# Altium PCB PCB_innerRing.PcbDoc
Units mil, origin at the board's own origin, x right, y up, seen from the top; angles counter-clockwise.
Board outline 3649.61 x 3649.61 mil, 2 copper layers (Top Layer, Bottom Layer); 31 components, 15 nets, 100 pads, 10 vias.
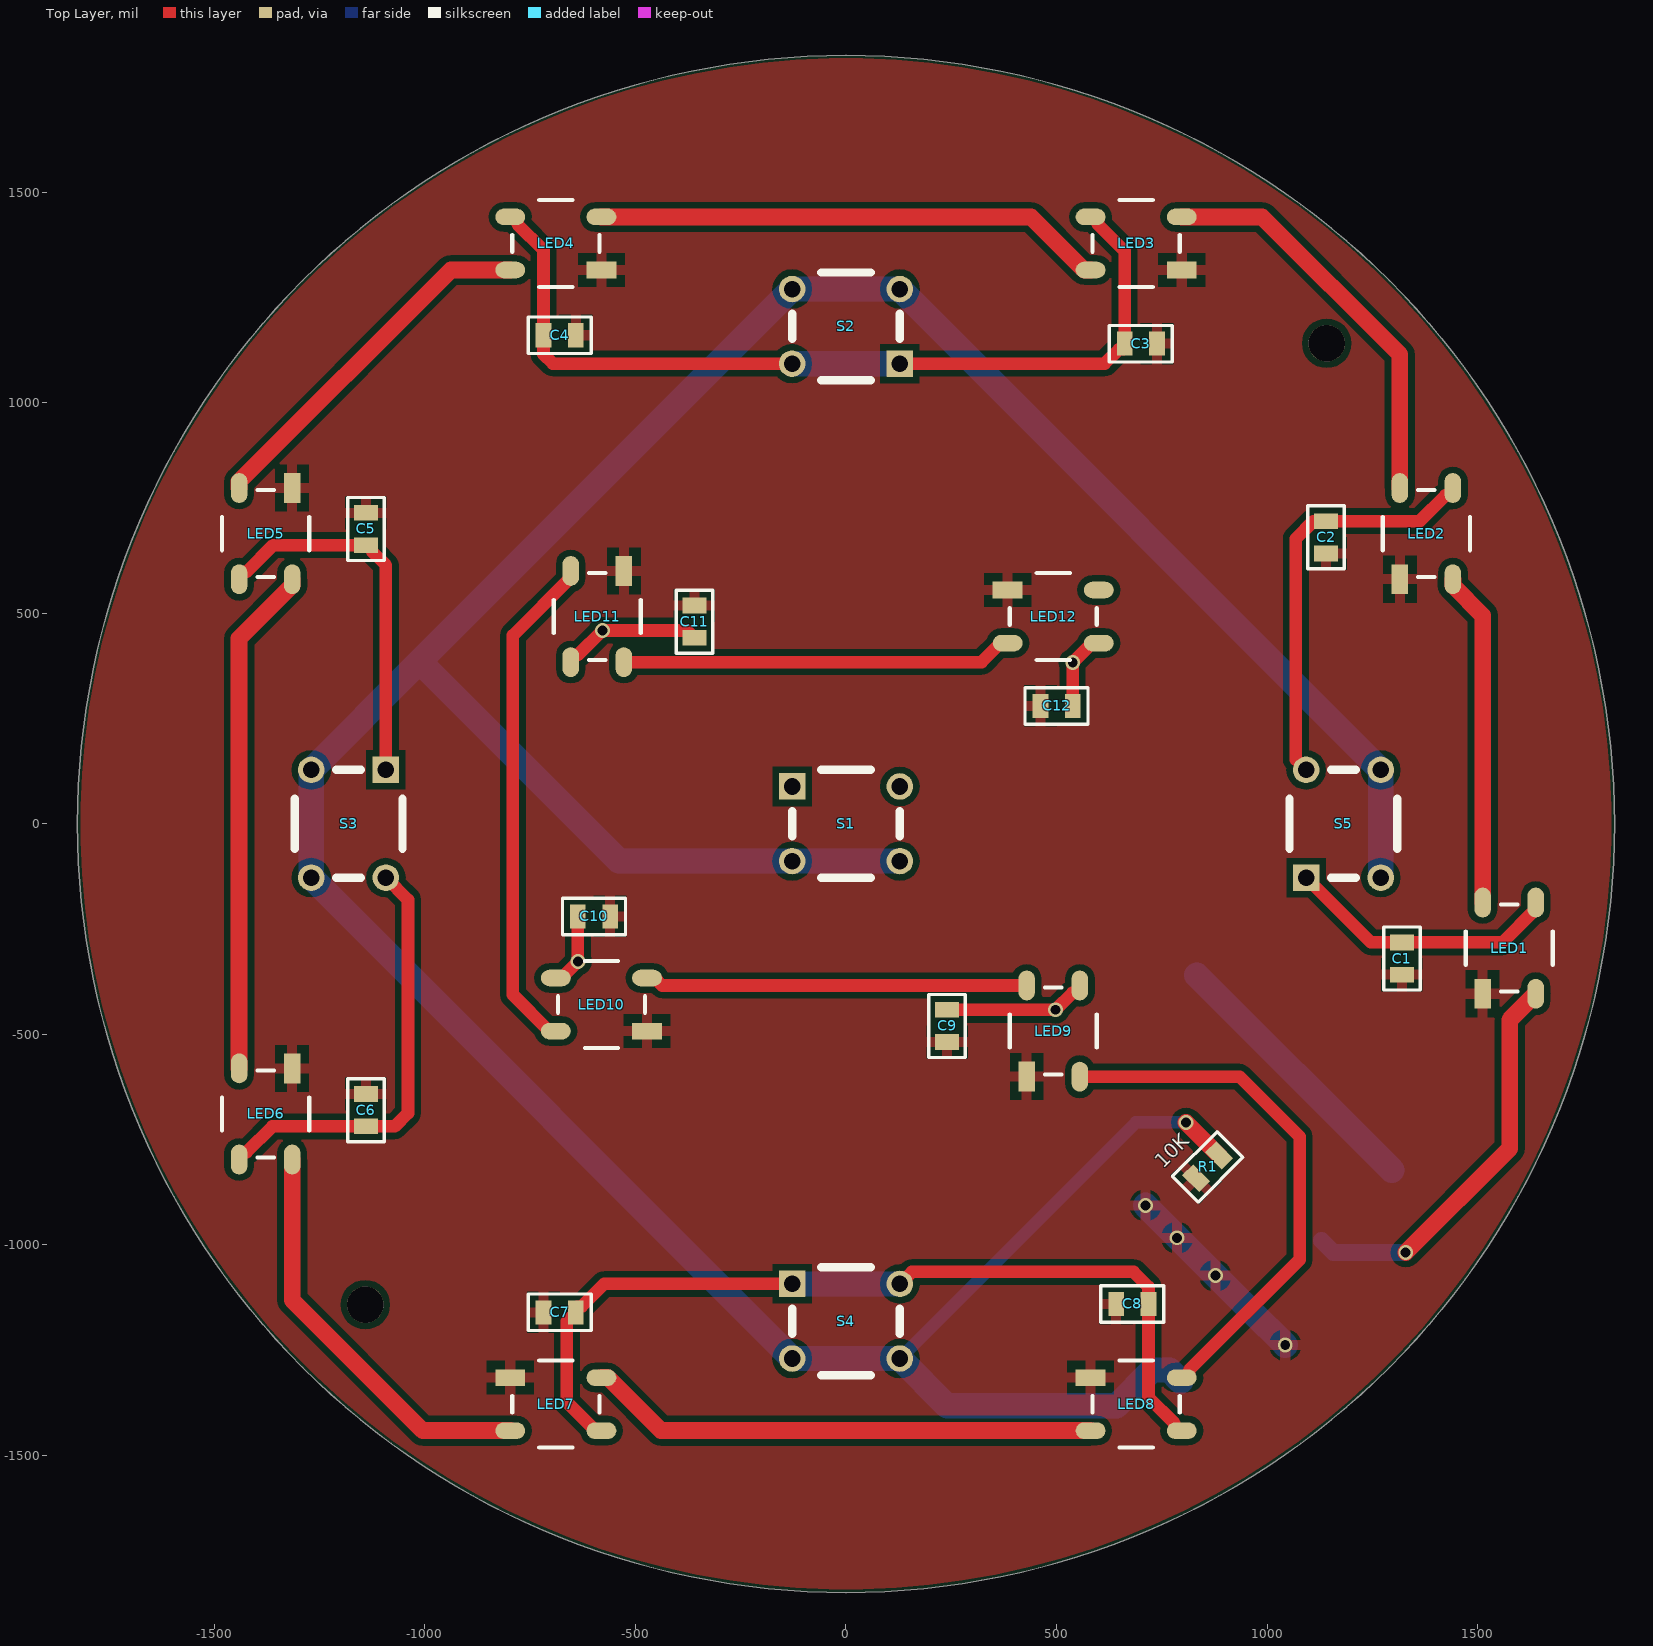
[diagram p0: Top Layer view]
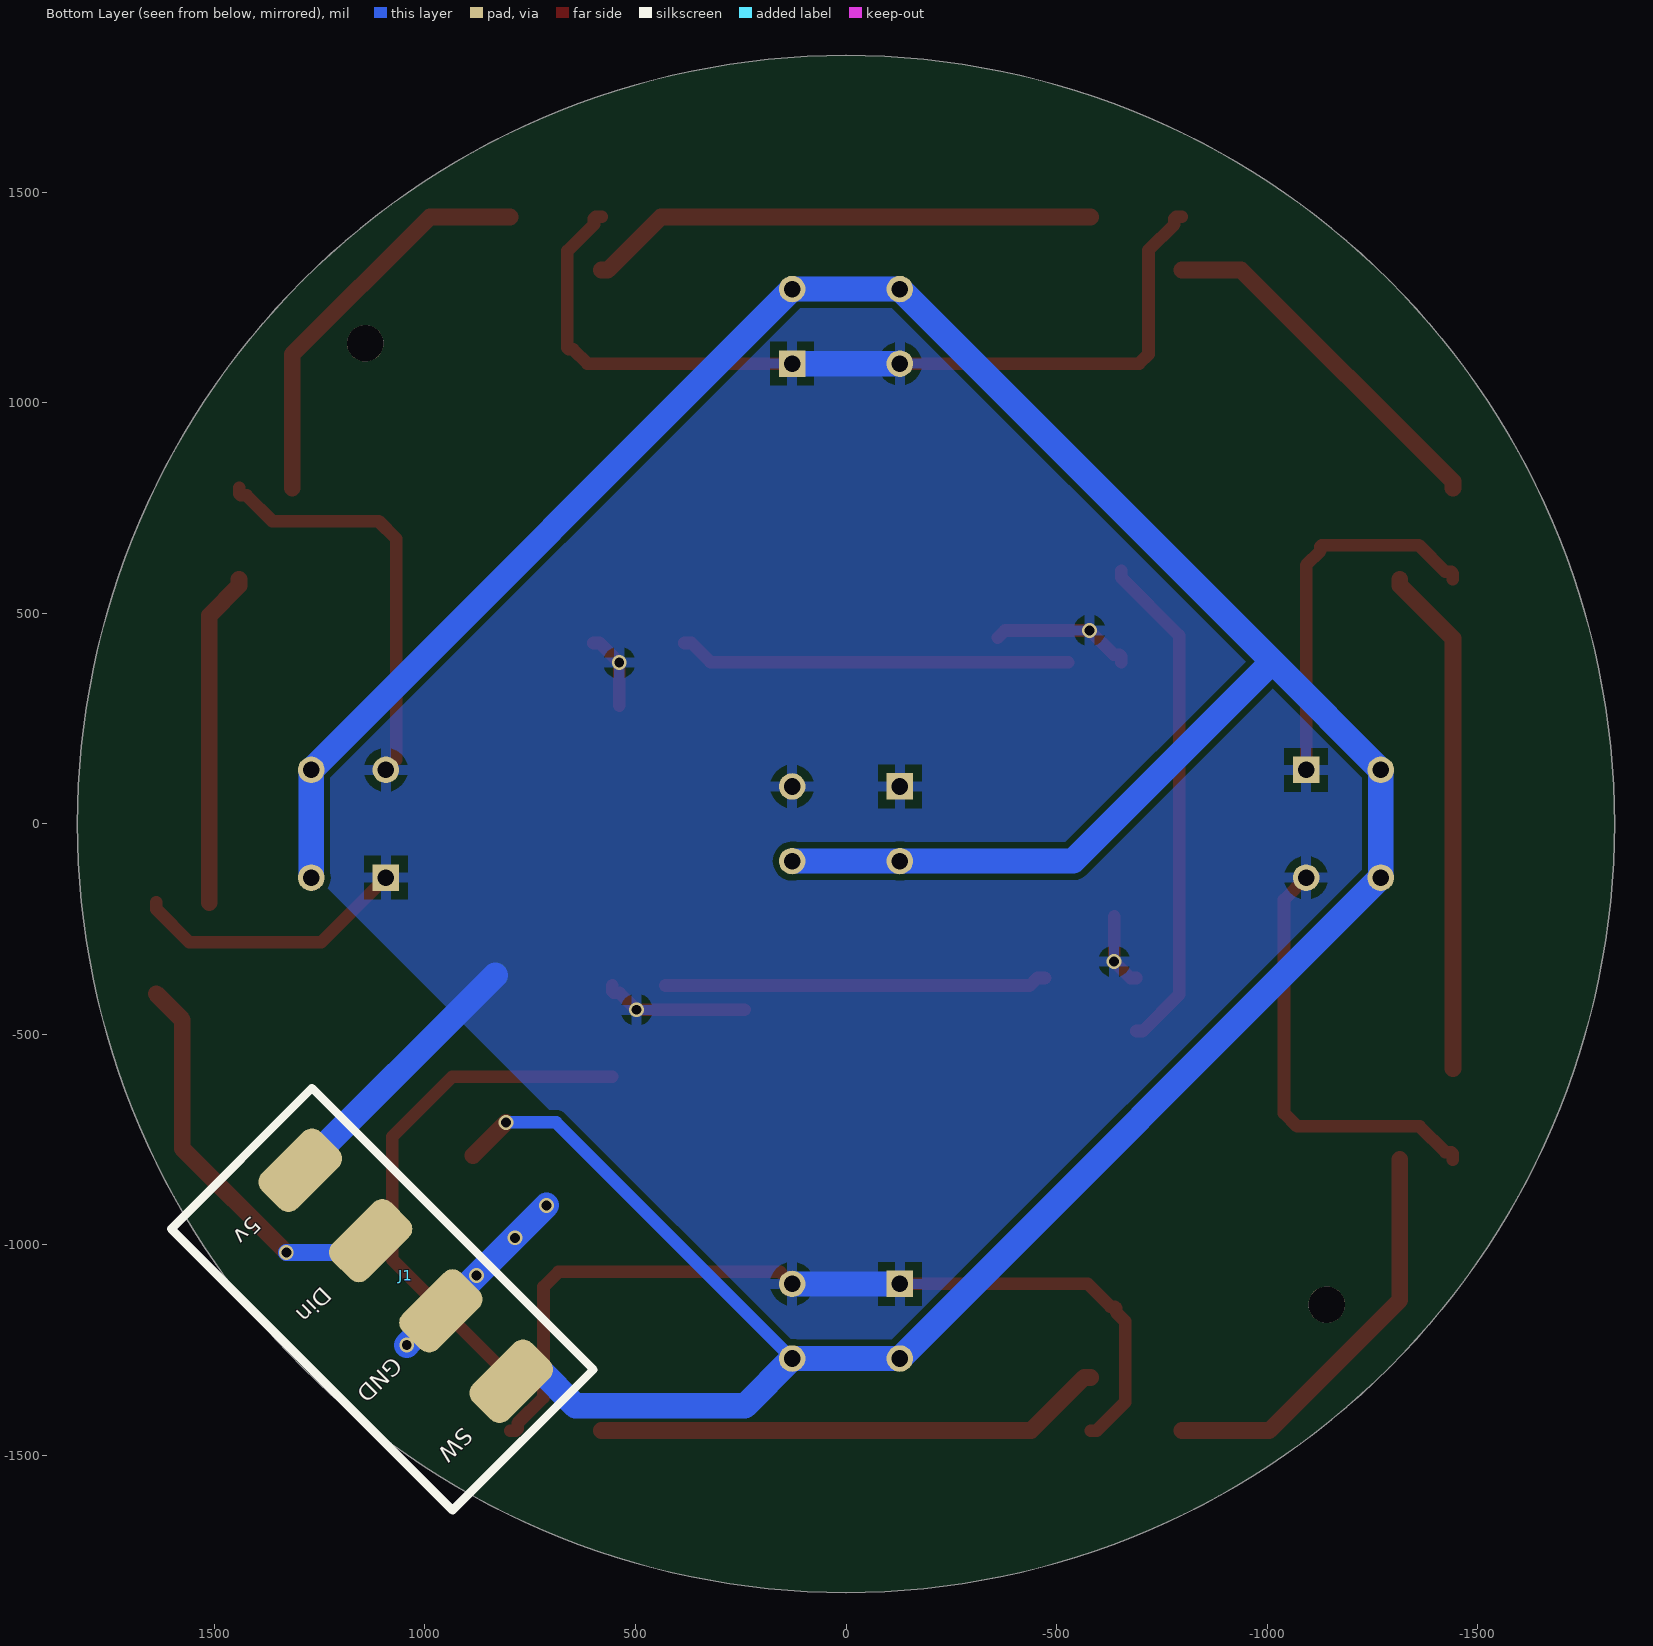
[diagram p1: Bottom Layer view, seen from below]
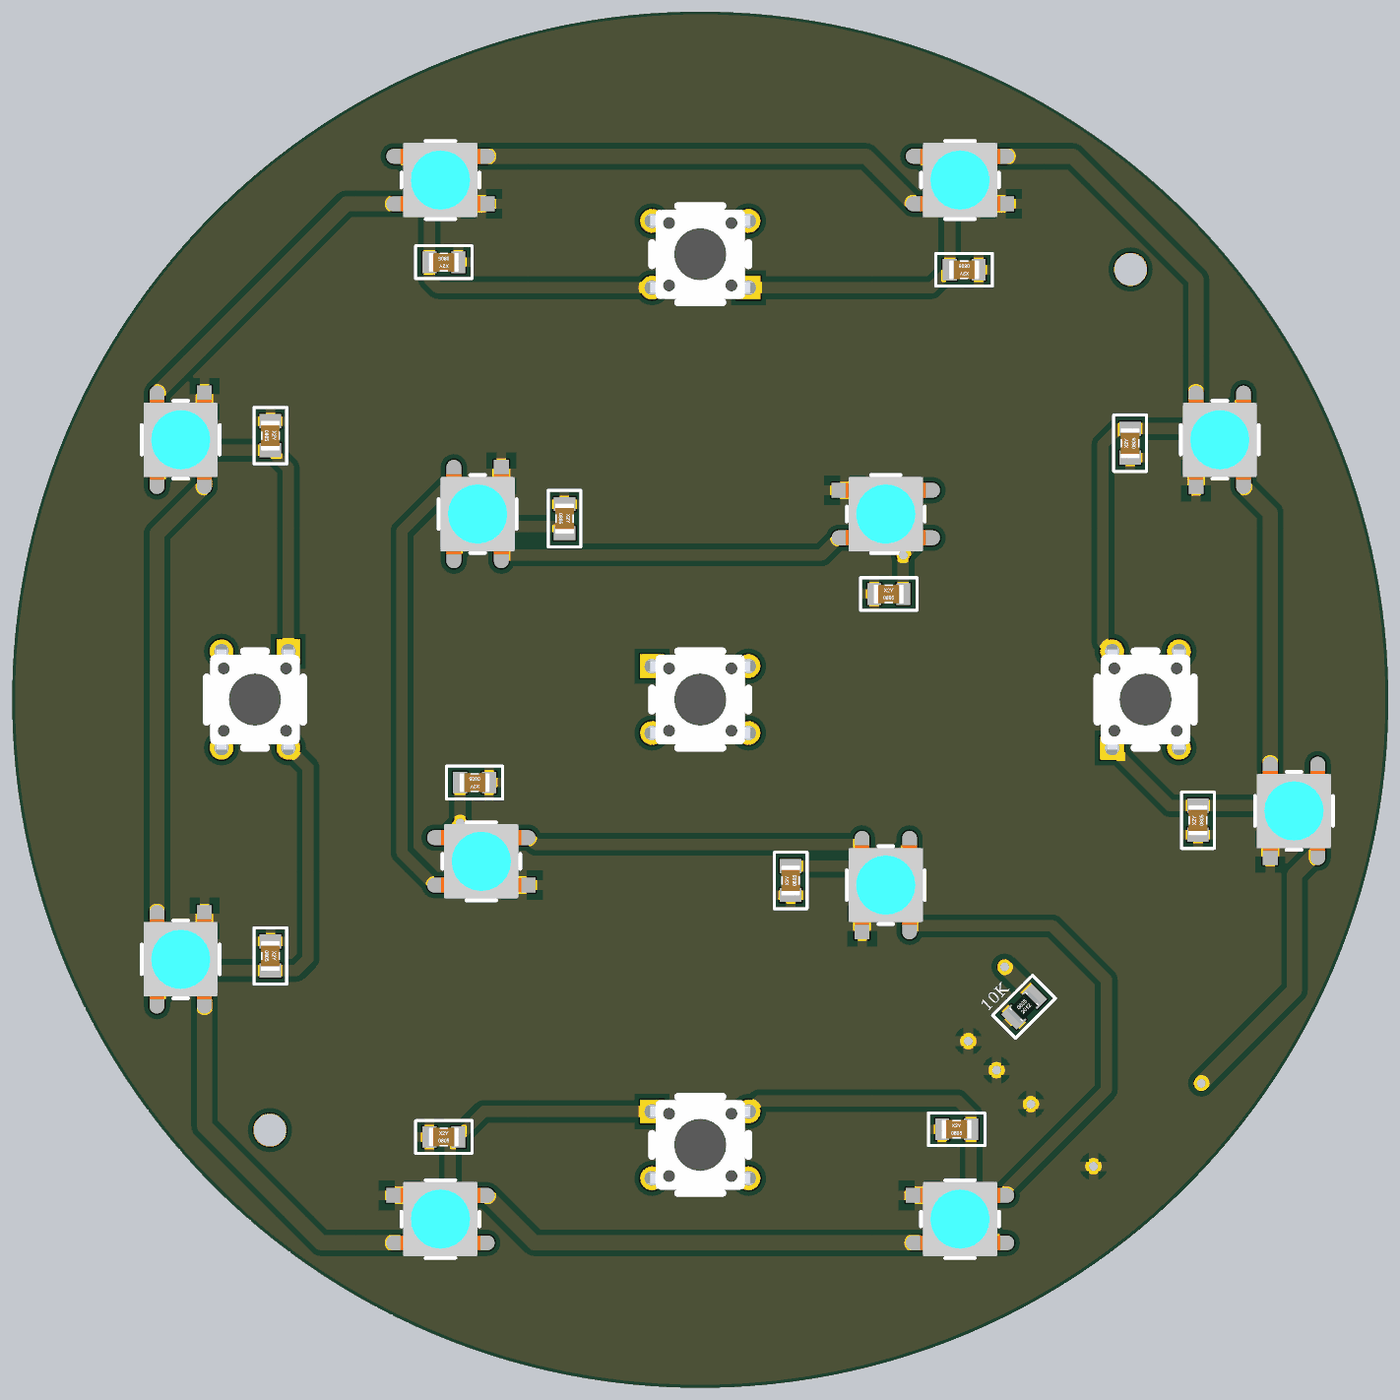
[diagram p2: 3D render of the assembled board from above, using the file's embedded part models]

## Layer stack, top to bottom
Top Solder: solder mask 0.4, Solder Resist, Dk 3.5
Top Layer: signal copper 1.4
Dielectric 1: dielectric 12.6, FR-4, Dk 4.8
Bottom Layer: signal copper 1.4
Bottom Solder: solder mask 0.4, Solder Resist, Dk 3.5

## Board outline
0,-1825.31 cw(c0,-0.5) -1824.8,-0.5 cw(c0,-0.5) 0,1824.3 cw(c0,-0.5) 1824.8,-0.5 cw(c0,-0.5)

## Design rules (kind name [scope] priority, off if disabled: settings)
Clearance [All] p1: gap=15 ignorepadtopadclearanceinfootprint=FALSE except(5: Arc-THPad Arc-Text Arc-Hole Track-THPad Track-Text Track-Hole SMDPad-SMDPad SMDPad-THPad SMDPad-Via SMDPad-Text SMDPad-Hole THPad-THPad THPad-Via THPad-Text THPad-Hole Via-Via Via-Text Via-Hole Fill-Text Fill-Hole Poly-Text Poly-Hole Region-Text Region-Hole Text-Text Text-Hole; 7: Arc-SMDPad Track-SMDPad; 9: Arc-Arc Arc-Track Track-Track; 10: Arc-Via Track-Via)
HoleSize [All] p1: absolutevalues=TRUE maxlimit=196.85 minlimit=1 maxpercent=80.000 minpercent=20.000
MinimumSolderMaskSliver [All] p1: minsoldermaskwidth=0
PolygonConnect [All] p1: connectstyle=Relief reliefconductorwidth=25 reliefentries=4 polygonreliefangle="90 Angle" airgapwidth=20
RoutingVias [All] p1: holewidth=11.81 width=19.68 viastyle="Through Hole" minholewidth=11.81 minwidth=19.68 maxholewidth=47.24 maxwidth=78.74
SilkToSilkClearance [All] p1: silktosilkclearance=5
SilkToSolderMaskClearance [IsPad] p1: minsilkscreentomaskgap=5 clearancetoexposedcopper=TRUE
SolderMaskExpansion [All] p1: expansion=4
Width [All] p1: maxlimit=100 minlimit=5 preferedwidth=10
26 further rules are at their usual default settings.

## Components (designator, comment, footprint, x,y, rotation, side; value= is the part's Value field where it differs from the comment)
C1 "capacitor0.1uf" Capacitor0805 1320,-320 r90 top
C2 "capacitor0.1uf" Capacitor0805 1140,680 r90 top
C3 "capacitor0.1uf" Capacitor0805 700,1140 r180 top
C4 "capacitor0.1uf" Capacitor0805 -680,1160 r180 top
C5 "capacitor0.1uf" Capacitor0805 -1140,700 r270 top
C6 "capacitor0.1uf" Capacitor0805 -1140,-680 r270 top
C7 "capacitor0.1uf" Capacitor0805 -680,-1160 r0 top
C8 "capacitor0.1uf" Capacitor0805 680,-1140 r0 top
C9 "capacitor0.1uf" Capacitor0805 240,-480 r90 top
C10 "capacitor0.1uf" Capacitor0805 -598.39,-220 r180 top
C11 "capacitor0.1uf" Capacitor0805 -360,480 r270 top
C12 "capacitor0.1uf" Capacitor0805 500,280 r0 top
J1 "4pins_edge_connector" 4pins_edge_connector 1114.96,-1142.8 r225 bottom
LED1 "Ws2812B" ws2812b 1574.8,-295.28 r270 top
LED2 "Ws2812B" ws2812b 1377.95,688.98 r270 top
LED3 "Ws2812B" ws2812b 688.98,1377.95 r0 top
LED4 "Ws2812B" ws2812b -688.98,1377.95 r0 top
LED5 "Ws2812B" ws2812b -1377.95,688.98 r90 top
LED6 "Ws2812B" ws2812b -1377.95,-688.98 r90 top
LED7 "Ws2812B" ws2812b -688.98,-1377.95 r180 top
LED8 "Ws2812B" ws2812b 688.98,-1377.95 r180 top
LED9 "Ws2812B" ws2812b 492.13,-492.13 r270 top
LED10 "Ws2812B" ws2812b -580.71,-429.13 r0 top
LED11 "Ws2812B" ws2812b -590.55,492.13 r90 top
LED12 "Ws2812B" ws2812b 492.13,492.13 r180 top
R1 "10K" R0805 858.68,-814.54 r45 top
S1 "6x6Switch" 6x6Switch 0,0 r0 top
S2 "6x6Switch" 6x6Switch 0,1181.1 r180 top
S3 "6x6Switch" 6x6Switch -1181.1,0 r270 top
S4 "6x6Switch" 6x6Switch 0,-1181.1 r0 top
S5 "6x6Switch" 6x6Switch 1181.1,0 r90 top

## Footprints (in the part's own frame and the unit in brackets; to place one, negate y for a bottom-side part, rotate by r counter-clockwise, add the part's x,y. Pads: shape width x height; smd on the part's side, far side on the other; paste and mask are expansions set on the pad)
4pins_edge_connector [mm]
  rrect50% 3x5 smd: 1(-9,2.5) 2(-3,2.5) 3(3,2.5) 4(9,2.5)
  silkscreen extent -12,-5.5 12,6.5
6x6Switch [mm]
  rect 1.6x1.6 hole 1: 1(-3.25,2.25)
  round 1.6 hole 1: 2(-3.25,-2.25) 3(3.25,-2.25) 4(3.25,2.25)
  silkscreen extent -3.25,-3.25 3.25,3.25, body extent -3.87,-3.01 3.87,3.02, height 5.01
Capacitor0805 [mm]
  rect 0.95x1.45 smd: 1(-0.975,0) 2(0.975,0)
  silkscreen extent -1.9,-1.1 1.9,1.1, body extent -1.02,-0.64 1.02,0.64, height 1.02
R0805 [mm]
  rect 0.95x1.45 smd: 1(-0.975,0) 2(0.975,0)
  silkscreen extent -1.9,-1.1 1.9,1.1, body extent -1,-0.62 1,0.63, height 0.46
ws2812b [mm]
  oval 1.8x1 smd: 1(-2.75,1.6) 2(-2.75,-1.6) 4(2.75,1.6)
  rect 1.8x1 smd: 3(2.75,-1.6)
  silkscreen extent -2.63,-2.63 2.63,2.63, body extent -2.7,-2.5 2.7,2.5, height 1.5

## Part data
C1 C2 C3 C4 C5 C6 C7 C8 C9 C10 C11 C12: "for leds and smol"
R1: library part resistor(CRCW0805360RFKEA, "Res Thick Film 0805 360 Ohm 1% 0.125W(1/8W) ∮100ppm/C Molded SMD Automotive Paper T/R", Case/Package=0805, Case Code (Metric)=2012, Manufacturer 1=Vishay, Manufacturer Part Number 1=CRCW0805360RFKEA, Max Operating Temperature=155¢XC, Max Power Dissipation=125mW, Min Operating Temperature=-55¢XC, Package Quantity=10, Resistance=360R, Supplier Part Number 1=541-360CCT-ND, Temperature Coefficient=100ppm/¢XC, Tolerance=1%, Voltage Rating=150V, Case Code (Imperial)=0805, Category="Chip SMD Resistors", ComponentLink1Description=https://datasheet.ciiva.com/2467/dcrcwe3-2467773.pdf?src-supplier=Digi-Key, ComponentLink1URL=https://datasheet.ciiva.com/2467/dcrcwe3-2467773.pdf?src-supplier=Digi-Key, Composition="Thick Film", Contact Plating=Tin, Depth=1.25mm, Features="Automotive AEC-Q200", Height=0.45mm, Lead Free="Lead Free", Length=2mm, Military Standard=Not, Number of Pins=2, Number of Terminals=2, Number of Terminations=2, Packaging="Tape and Reel", Power Rating=125mW, Pricing 1="1=0.10000, 10=0.06000, 100=0.02450, 1000=0.01102, 2500=0.00957 (USD)", Radiation Hardening=No, REACH SVHC=Unknown, RoHS=Yes, Stock 1=25005, Supplier 1=Digi-Key, Termination=SMD/SMT, Voltage Rating (DC)=150V, Weight=0.000194oz, Width=0.049inch

## Free pads (board coordinates)
  round 86.61 hole 86.61: 99(-1141.39,-1141.9) 99(1141.39,1140.89)

## Via types
v1: diameter 35.43, hole 23.62, Top Layer to Bottom Layer, 10 vias

## Nets (pads, with @x,y where several pads share a name; then routed paths per layer and width w, separated by ;. In a path a pad name is that pad's centre, name@x,y a point inside that pad or via, vN(x,y) a via of type N, cw(c..) or ccw(c..) an arc to the next point about the centre after c; other vN are vias at no path point)
+5: C1.2 C2.2 C3.2 C4.2 C5.2 C6.2 C7.2 C8.2 C9.2 C10.2 C11.2 C12.2 J1.1 LED1.1 LED2.1 LED3.1 LED4.1 LED5.1 LED6.1 LED7.1 LED8.1 LED9.1 LED10.1 LED11.1 LED12.1 S1.1 S1.4 S2.1 S2.4 S3.1 S3.4 S4.1 S4.4 S5.1 S5.4 | length 9542
  Top Layer w30: LED6.1 -1440.95,-784.03 -1436.62,-779.7 -1423.4,-779.7 -1362.09,-718.39 C6.2 -1071.39,-718.39 -1040,-687 -1040,-180.47 S3.4 ; LED5.1 -1440.95,593.92 -1436.62,598.25 -1423.4,598.25 -1360.04,661.61 C5.2 -1130.16,661.61 -1126.46,657.91 -1126.46,648.07 -1092.52,614.13 S3.1 ; LED4.1 -784.03,1440.94 -779.7,1436.62 -779.7,1423.4 -718.39,1362.09 C4.2 -718.39,1114.96 -695.95,1092.52 S2.4 ; LED10.1 -675.76,-366.14 v1(-636.77,-327.15) C10.2 ; LED11.1 -653.54,397.07 -649.22,401.4 -636,401.4 v1(-578.4,459) -377.39,459 C11.2 ; LED7.1 -595.29,-1440.95 -663,-1373.24 -663,-1181.39 C7.2 -641.61,-1150.16 -637.91,-1146.46 -628.07,-1146.46 -574.13,-1092.52 S4.1 ; S4.4 156.47,-1064 683,-1064 718.39,-1099.39 C8.2 718.39,-1362.09 779.7,-1423.4 779.7,-1436.62 784.03,-1440.95 LED8.1 ; S2.1 614.13,1092.52 648.07,1126.46 657.91,1126.46 661.61,1130.16 C3.2 661.61,1360.04 598.25,1423.4 598.25,1436.62 593.92,1440.94 LED3.1 ; C9.2 v1(497.36,-441.61) 537.58,-401.4 550.79,-401.4 555.12,-397.07 LED9.1 ; C12.2 v1(538.39,382.87) 584.65,429.13 LED12.1 ; S5.1 1246.18,-281.61 C1.2 1558.94,-281.61 1637.8,-202.76 LED1.1 ; S5.4 1068,152.47 1068,677 1109.39,718.39 C2.2 1362.09,718.39 1423.4,779.7 1436.62,779.7 1440.95,784.03 LED2.1
  Bottom Layer w60: S4.1 S4.4 ; S2.4 S2.1 ; 833,-359.74 J1.1
Button_data: J1.4 R1.2 S1.2 S1.3 S2.2 S2.3 S3.2 S3.3 S4.2 S4.3 S5.2 S5.3 | length 8991.3
  Top Layer w40: v1(807.43,-709) R1.2
  Bottom Layer w30: S4.3 688.64,-709 v1(807.43,-709)
  Bottom Layer w60: S1.3 S1.2 -539.42,-88.58 -1004.82,376.82 -1020.82,376.82 ; J1.4 768.21,-1297.15 727.12,-1297.15 642.27,-1382 240.27,-1382 S4.3 S4.2 S3.3 S3.2 -1020.82,376.82 ; S5.2 S5.3 S2.2 S2.3 -1020.82,376.82
GND: C1.1 C2.1 C3.1 C4.1 C5.1 C6.1 C7.1 C8.1 C9.1 C10.1 C11.1 C12.1 J1.3 LED1.3 LED2.3 LED3.3 LED4.3 LED5.3 LED6.3 LED7.3 LED8.3 LED9.3 LED10.3 LED11.3 LED12.3 R1.1 | length 469.5
  Bottom Layer w60: v1(711,-905.87) J1.3 v1(1043,-1237.87)
  other v1: 877,-1073 786,-983
Led_din: J1.2 LED1.4 | length 954.2
  Top Layer w40: v1(1329,-1018) 1576,-771 1576,-465.34 LED1.4
  Bottom Layer w40: J1.2 1157.19,-1018 v1(1329,-1018)
NetLED1_2: LED1.2 LED2.4 | length 797.1
  Top Layer w40: LED2.4 1440.94,565.59 1511.81,494.72 LED1.2
NetLED2_2: LED2.2 LED3.4 | length 969.9
  Top Layer w40: LED3.4 988.05,1440.94 1314.96,1114.04 LED2.2
NetLED3_2: LED3.2 LED4.4 | length 1213.6
  Top Layer w40: LED4.4 439.61,1440.94 565.59,1314.96 LED3.2
NetLED4_2: LED4.2 LED5.4 | length 867
  Top Layer w40: LED5.4 -1440.95,812.36 -938.35,1314.96 LED4.2
NetLED5_2: LED5.2 LED6.4 | length 1213.6
  Top Layer w40: LED6.4 -1440.95,439.61 -1314.96,565.59 LED5.2
NetLED6_2: LED6.2 LED7.4 | length 979.9
  Top Layer w40: LED6.2 -1314.96,-1131.04 -1005.06,-1440.95 LED7.4
NetLED7_2: LED7.2 LED8.4 | length 1213.6
  Top Layer w40: LED7.2 -565.59,-1314.96 -439.61,-1440.95 LED8.4
NetLED8_2: LED8.2 LED9.4 | length 1276.5
  Top Layer w30: LED9.4 934.39,-600.39 1077,-743 1077,-1035.2 814.78,-1297.42 814.78,-1310.63 810.46,-1314.96 LED8.2
NetLED9_2: LED9.2 LED10.4 | length 908.9
  Top Layer w30: LED10.4 -454.16,-366.14 -436.44,-383.86 LED9.2
NetLED10_2: LED10.2 LED11.4 | length 1200.8
  Top Layer w30: LED10.2 -704.72,-492.13 -790.85,-406 -790.85,447.34 -653.54,584.65 LED11.4
NetLED11_2: LED11.2 LED12.4 | length 930.2
  Top Layer w30: LED11.2 321.91,383.86 367.18,429.13 LED12.4
pads on no net: LED12.2

## Polygon pours and split planes (outlines as drawn)
+5 on Bottom Layer "+5_L02_P000" (solid, remove dead copper, pour order 0): 1269.69,127.95 1269.69,-127.95 1255.05,-127.95 112,-1271 110.69,-1269.69 -127.95,-1269.69 -1269.69,-127.95 -1269.69,127.95 -127.95,1269.69 127.95,1269.69
GND on Top Layer "GND_L01_P001" (solid, pour order 1): 0,-1817.15 cw(c0,0) -1817.15,0 cw(c0,0) 0,1817.15 cw(c0,0) 1817.15,0 cw(c0,0)

## Text inside footprints (layer, text, board x,y; h text height)
J1: Bottom Overlay "5v" at 1421.18,-920.08 h66.93 r135; Bottom Overlay "Din" at 1254.15,-1087.12 h66.93 r135; Bottom Overlay "GND" at 1087.12,-1254.15 h66.93 r135; Bottom Overlay "SW" at 920.08,-1421.18 h66.93 r135